# EAGLE board e-Tapperhandpiece17 (EAGLE 8.2.2)

Size 43.16 x 35.23 mm. Coordinates in mm from the lower left corner, seen from the top.
Outline: 0,0 43.16,0 43.16,35.23 0,35.23 0,0
Copper layers (1*16): Top 0.035mm / dielectric 1.5mm / Bottom 0.035mm
Design rules "e-tapperhandpiece14": minimum track width 5mil, minimum drill 15mil, track to track 5mil, track to pad 5mil, pad to pad 5mil, via to via 5mil, smd to smd 5mil, copper to edge 5mil, drill to drill 5mil, minimum pad ring 10mil, minimum via ring 8mil, stop-mask expansion 4mil, vias tented up to drill 0mil, thermal gap 10mil
Net classes: 0 default: clearance 0.205 mm

## Footprints (pad centres in the part's own frame; a part is rotated, then mirrored left to right if it is on the bottom)
C0603 = smd 1.1 x 1: 1 -0.85,0; 2 0.85,0
C0805 = smd 1.3 x 1.5: 1 -0.95,0; 2 0.95,0
SE11 = drill 1.118 pad 2.159 octagon: MP 0,0
R0402 = smd 0.7 x 0.9: 1 -0.65,0; 2 0.65,0
ET1 = drill 0.508 square: P$1 0,0
QFN38-5X7 = smd 0.7 x 0.25: 1 -2.4,2.75; 2 -2.4,2.25; 3 -2.4,1.75; 4 -2.4,1.25; 5 -2.4,0.75; 6 -2.4,0.25; 7 -2.4,-0.25; 8 -2.4,-0.75; 9 -2.4,-1.25; 10 -2.4,-1.75; 11 -2.4,-2.25; 12 -2.4,-2.75; 20 2.4,-2.75; 21 2.4,-2.25; 22 2.4,-1.75; 23 2.4,-1.25; 24 2.4,-0.75; 25 2.4,-0.25; 26 2.4,0.25; 27 2.4,0.75; 28 2.4,1.25; 29 2.4,1.75; 30 2.4,2.25; 31 2.4,2.75 | smd 0.25 x 0.7: 13 -1.5,-3.4; 14 -1,-3.4; 15 -0.5,-3.4; 16 0,-3.4; 17 0.5,-3.4; 18 1,-3.4; 19 1.5,-3.4; 32 1.5,3.4; 33 1,3.4; 34 0.5,3.4; 35 0,3.4; 36 -0.5,3.4; 37 -1,3.4; 38 -1.5,3.4 | smd 3.2 x 5.2: EXP 0,0
SS112D01 = drill 0.8 square: P$1 6.35,3.81 | drill 0.8: P$2 6.35,5.81; P$3 6.35,7.81; P$4 6.35,9.81; P$5 6.35,11.81; P$6 6.35,13.81; P$7 6.35,15.81; P$8 6.35,17.81; P$9 6.35,19.81; P$10 6.35,21.81; P$11 6.35,23.81; P$12 6.35,25.81; P$13 6.35,27.81; P$14 6.35,29.81 | drill 1.3 square: P$15 9.15,31.81; P$16 3.55,31.81; P$17 9.15,1.81; P$18 3.55,1.81

## Placement (x,y rotation side)
C1  [C0603]  21.59,3.81 0 top
C2  [C0603]  21.59,6.35 0 top
C3  [C0603]  21.59,8.89 0 top
C4  [C0603]  21.59,11.43 0 top
C5  [C0603]  21.59,13.97 0 top
C6  [C0603]  21.59,16.51 0 top
C7  [C0603]  21.59,19.05 0 top
C8  [C0603]  21.59,21.59 0 top
C9  [C0603]  21.59,24.13 0 top
C10  [C0603]  21.59,26.67 0 top
C11  [C0603]  21.59,29.21 0 top
C12  [C0603]  21.59,31.75 0 top
C13  0.1 uF  [C0603]  8.89,27.94 180 top
C14  10 uF  [C0805]  8.89,11.43 90 top
LSP13  SE11  [SE11]  3.81,22.86 0 top
R1  [R0402]  17.78,3.81 180 top
R2  [R0402]  17.78,6.35 180 top
R3  [R0402]  17.78,8.89 180 top
R4  [R0402]  17.78,11.43 180 top
R5  [R0402]  17.78,13.97 180 top
R6  [R0402]  17.78,16.51 180 top
R7  [R0402]  17.78,19.05 180 top
R8  [R0402]  17.78,21.59 180 top
R9  [R0402]  17.78,24.13 180 top
R10  [R0402]  17.78,26.67 180 top
R11  [R0402]  17.78,29.21 180 top
R12  [R0402]  17.78,31.75 180 top
R13  [R0402]  25.4,3.81 0 top
R14  [R0402]  25.4,6.35 0 top
R15  [R0402]  25.4,8.89 0 top
R16  [R0402]  25.4,11.43 0 top
R17  [R0402]  25.4,13.97 0 top
R18  [R0402]  25.4,16.51 0 top
R19  [R0402]  25.4,19.05 0 top
R20  [R0402]  25.4,21.59 0 top
R21  [R0402]  25.4,24.13 0 top
R22  [R0402]  25.4,26.67 0 top
R23  [R0402]  25.4,29.21 0 top
R24  [R0402]  25.4,31.75 0 top
R25  10 K  [R0402]  3.81,17.78 90 top
TSP1  ET1  [ET1]  40.64,3.81 0 top
TSP2  ET1  [ET1]  40.64,6.35 0 top
TSP3  ET1  [ET1]  40.64,8.89 0 top
TSP4  ET1  [ET1]  40.64,11.43 0 top
TSP5  ET1  [ET1]  40.64,13.97 0 top
TSP6  ET1  [ET1]  40.64,16.51 0 top
TSP7  ET1  [ET1]  40.64,19.05 0 top
TSP8  ET1  [ET1]  40.64,21.59 0 top
TSP9  ET1  [ET1]  40.64,24.13 0 top
TSP10  ET1  [ET1]  40.64,26.67 0 top
TSP11  ET1  [ET1]  40.64,29.21 0 top
TSP12  ET1  [ET1]  40.64,31.75 0 top
TSP13  ET1  [ET1]  3.81,25.4 0 top
TSP14  ET1  [ET1]  3.81,30.48 0 top
TSP15  ET1  [ET1]  3.81,10.16 0 top
TSP16  ET1  [ET1]  3.81,11.43 0 top
TSP17  ET1  [ET1]  3.81,12.7 0 top
TSP18  ET1  [ET1]  3.81,13.97 90 top
TSP19  ET1  [ET1]  3.81,15.24 90 top
U$1  LTC2497  [QFN38-5X7]  10.16,22.86 90 top
U$2  SS112D01  [SS112D01]  26.67,1.27 0 top

## Library data of the parts
C1-C14 = rcl
LSP13 = solpad
R1-R25 = resistor
TSP1-TSP19 = ET1
U$1 = LTC2497
U$2 = SS112D01

## Nets
N$1: C9.1 R9.2 R21.1 U$1.16
N$2: U$1.26 U$1.27
N$3: U$1.24 U$1.25
N$5: C12.1 R12.2 R24.1 U$1.19
N$7: C4.1 R4.2 R16.1 U$1.11
N$8: C10.1 R10.2 R22.1 U$1.17
N$9: C8.1 R8.2 R20.1 U$1.15
N$18: C5.1 R5.2 R17.1 U$1.12
N$19: C6.1 R6.2 R18.1 U$1.13
N$20: C7.1 R7.2 R19.1 U$1.14
N$22: C3.1 R3.2 R15.1 U$1.10
N$23: C2.1 R2.2 R14.1 U$1.9
N$24: C11.1 R11.2 R23.1 U$1.18
N$25: C1.1 R1.2 R13.1 U$1.8
TP1: R13.2 TSP1.P$1 U$2.P$2
TP2: R14.2 TSP2.P$1 U$2.P$3
TP3: R15.2 TSP3.P$1 U$2.P$4
TP4: R16.2 TSP4.P$1 U$2.P$5
TP5: R17.2 TSP5.P$1 U$2.P$6
TP6: R18.2 TSP6.P$1 U$2.P$7
TP7: R19.2 TSP7.P$1 U$2.P$8
TP8: R20.2 TSP8.P$1 U$2.P$9
TP9: R21.2 TSP9.P$1 U$2.P$10
TP10: R22.2 TSP10.P$1 U$2.P$11
TP11: R23.2 TSP11.P$1 U$2.P$12
TP12: R24.2 TSP12.P$1 U$2.P$13
TS+: LSP13.MP TSP13.P$1
TS-: TSP14.P$1 U$2.P$1 U$2.P$14
TSCA: TSP18.P$1 U$1.36
TSCL: TSP16.P$1 U$1.2
TSDA: R25.1 TSP17.P$1 U$1.3
TSGND: C1.2 C2.2 C3.2 C4.2 C5.2 C6.2 C7.2 C8.2 C9.2 C10.2 C11.2 C12.2 C13.2 C14.2 R1.1 R2.1 R3.1 R4.1 R5.1 R6.1 R7.1 R8.1 R9.1 R10.1 R11.1 R12.1 TSP19.P$1 U$1.1 U$1.4 U$1.6 U$1.7 U$1.20 U$1.21 U$1.22 U$1.23 U$1.30 U$1.31 U$1.32 U$1.33 U$1.34 U$1.35 U$1.37 U$1.38
VCC: C13.1 C14.1 R25.2 TSP15.P$1 U$1.28 U$1.29

## Tracks (layer width: path | path; a pad name or v marks a point on that pad's centre or on a via)
N$1  (3 unrouted)
N$2  (1 unrouted)
N$3  (1 unrouted)
N$5  (3 unrouted)
N$7  (3 unrouted)
N$8  (3 unrouted)
N$9  (3 unrouted)
N$18  (3 unrouted)
N$19  (3 unrouted)
N$20  (3 unrouted)
N$22  (3 unrouted)
N$23  (3 unrouted)
N$24  (3 unrouted)
N$25  (3 unrouted)
TP1  (2 unrouted)
TP2  (2 unrouted)
TP3  (2 unrouted)
TP4  (2 unrouted)
TP5  (2 unrouted)
TP6  (2 unrouted)
TP7  (2 unrouted)
TP8  (2 unrouted)
TP9  (2 unrouted)
TP10  (2 unrouted)
TP11  (2 unrouted)
TP12  (2 unrouted)
TS+  (1 unrouted)
TS-  (2 unrouted)
TSCA  (1 unrouted)
TSCL  (1 unrouted)
TSDA  (2 unrouted)
TSGND  (42 unrouted)
VCC  (5 unrouted)